# Altium PCB CR-10 Motherboard.PcbDoc (part 6 of 14)
Units mil, origin at the board's own origin, x right, y up, seen from the top; angles counter-clockwise.
Board outline 3970.48 x 2769.68 mil, 2 copper layers (TopLayer, BottomLayer); 147 components, 128 nets, 667 pads, 614 vias.
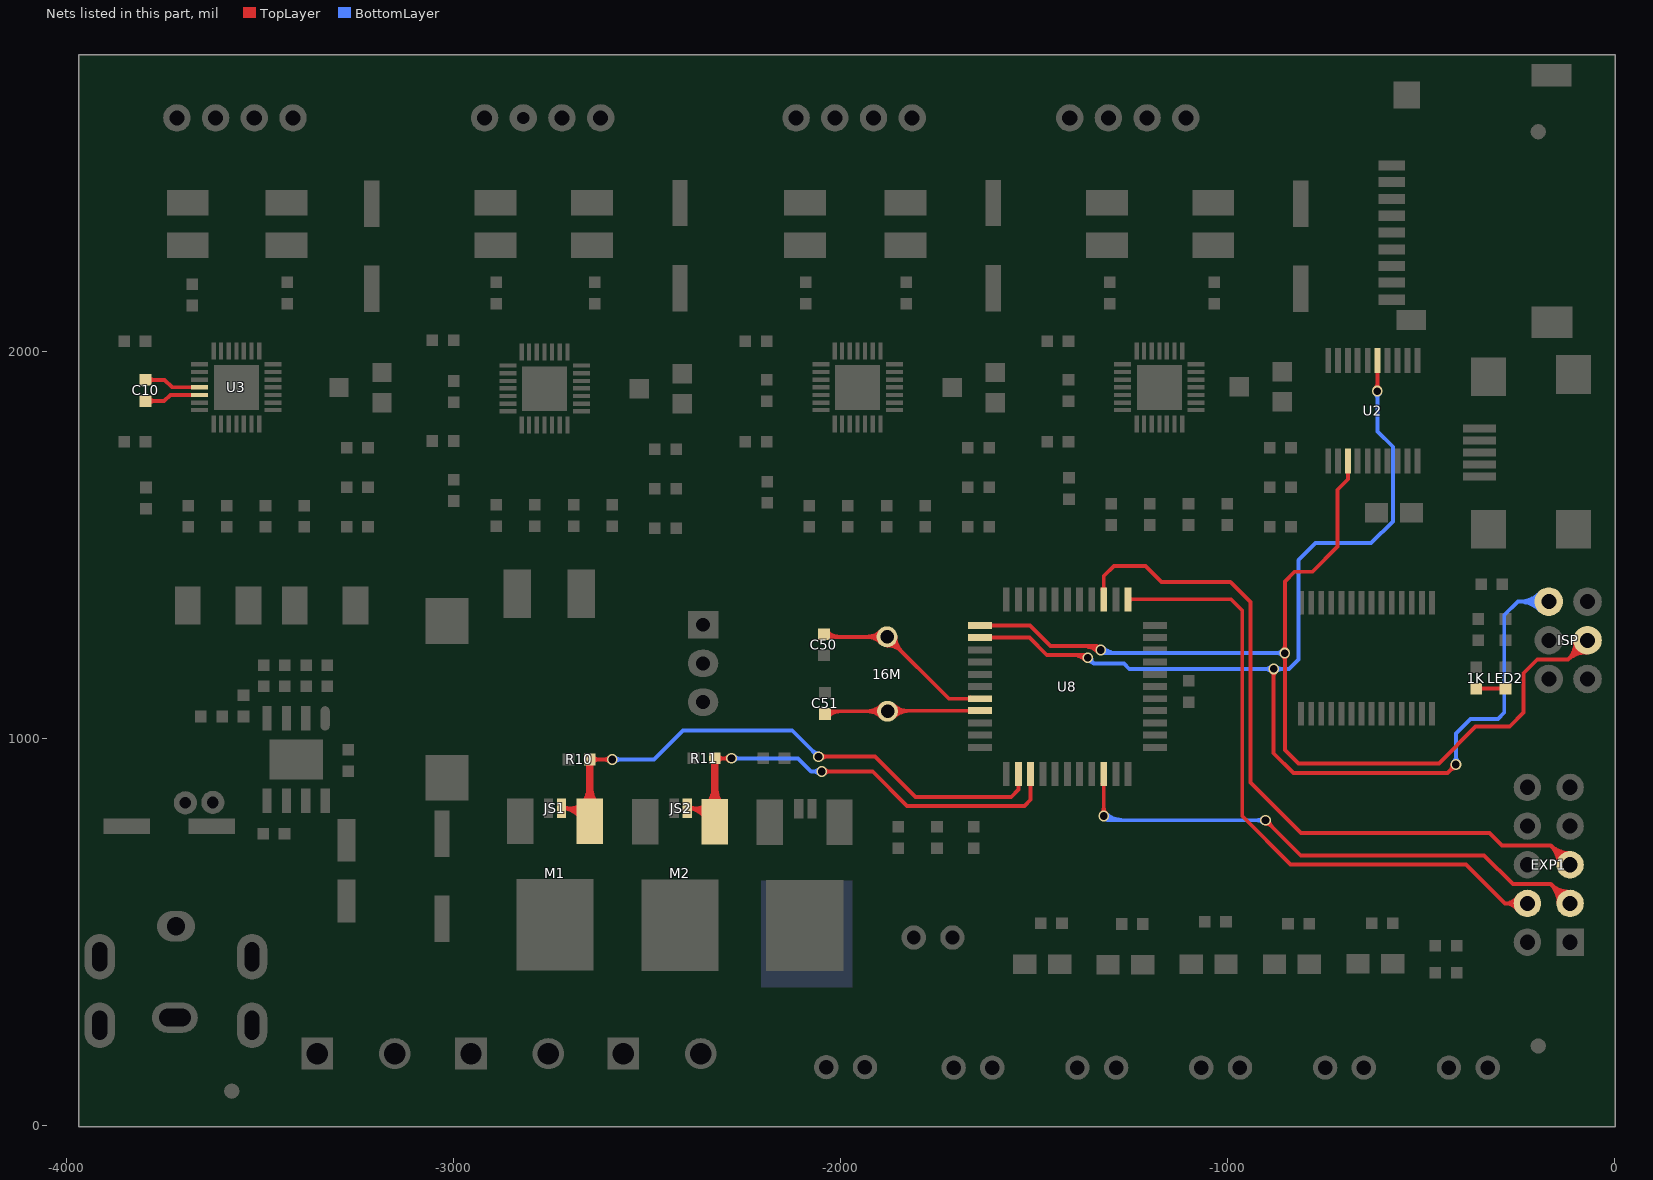
[diagram p6: the nets of this part, all layers, seen from the top]

## Via types
v1: diameter 28, hole 18, TopLayer to BottomLayer, tented both sides, 246 vias
v2: diameter 27.56, hole 19.68, TopLayer to BottomLayer, tented both sides, 196 vias
v3: diameter 20, hole 12, TopLayer to BottomLayer, tented both sides, 124 vias
v4: diameter 27.56, hole 11.81, TopLayer to BottomLayer, tented bottom, 16 vias
v5: diameter 27.56, hole 19.68, TopLayer to BottomLayer, 16 vias
v6: diameter 20, hole 12, TopLayer to BottomLayer, 12 vias
v7: diameter 28, hole 11.81, TopLayer to BottomLayer, tented both sides, 4 vias

## Nets (pads, with @x,y where several pads share a name; then routed paths per layer and width w, separated by ;. In a path a pad name is that pad's centre, name@x,y a point inside that pad or via, vN(x,y) a via of type N, cw(c..) or ccw(c..) an arc to the next point about the centre after c; other vN are vias at no path point) (continued)
Hotbed: JS1.1 M1.1 R10.1 U8.13 | length 6196.2
  TopLayer w10: M1.1@-2647.54,786.84 -2681.54,820.84 JS1.1@-2720.54,820.84 ; R10.1@-2647.54,946.84 v2(-2589.54,946.84) ; v2@-2056.54,954.84 -1910.54,954.84 -1805.54,849.84 -1558.54,849.84 -1539.54,868.84 U8.13@-1539.54,908.84 ; JS1.1@-2720.54,820.84 cw(c-2720.53,760.73) M1.1@-2671.29,795.21 ; JS1.1@-2720.54,820.84 cw(c-2720.53,760.73) M1.1@-2671.29,795.21 ; JS1.1@-2720.54,820.84 cw(c-2720.53,760.73) M1.1@-2671.29,795.21 ; JS1.1@-2720.54,820.84 cw(c-2720.53,760.73) M1.1@-2671.29,795.21 ; JS1.1@-2720.54,820.84 cw(c-2720.53,760.73) M1.1@-2671.29,795.21 ; JS1.1@-2720.54,820.84 cw(c-2720.53,760.73) M1.1@-2671.29,795.21 ; JS1.1@-2720.54,820.84 cw(c-2720.53,760.73) M1.1@-2671.29,795.21 ; JS1.1@-2720.54,820.84 cw(c-2720.53,760.73) M1.1@-2671.29,795.21 ; JS1.1@-2720.54,820.84 cw(c-2720.53,760.73) M1.1@-2671.29,795.21 ; JS1.1@-2715.59,815.89 cw(c-2703.64,803.94) -2703.64,820.84 ; JS1.1@-2715.59,815.89 cw(c-2703.64,803.94) -2703.64,820.84 ; JS1.1@-2715.59,815.89 cw(c-2703.64,803.94) -2703.64,820.84 ; JS1.1@-2715.59,815.89 cw(c-2703.64,803.94) -2703.64,820.84 ; JS1.1@-2715.59,815.89 cw(c-2703.64,803.94) -2703.64,820.84 ; JS1.1@-2715.59,815.89 cw(c-2703.64,803.94) -2703.64,820.84 ; JS1.1@-2715.59,815.89 cw(c-2703.64,803.94) -2703.64,820.84 ; JS1.1@-2715.59,815.89 cw(c-2703.64,803.94) -2703.64,820.84 ; JS1.1@-2715.59,815.89 cw(c-2703.64,803.94) -2703.64,820.84 ; JS1.1@-2715.59,825.79 ccw(c-2703.64,837.74) -2703.64,820.84 ; JS1.1@-2715.59,825.79 ccw(c-2703.64,837.74) -2703.64,820.84 ; JS1.1@-2715.59,825.79 ccw(c-2703.64,837.74) -2703.64,820.84 ; JS1.1@-2715.59,825.79 ccw(c-2703.64,837.74) -2703.64,820.84 ; JS1.1@-2715.59,825.79 ccw(c-2703.64,837.74) -2703.64,820.84 ; JS1.1@-2715.59,825.79 ccw(c-2703.64,837.74) -2703.64,820.84 ; JS1.1@-2715.59,825.79 ccw(c-2703.64,837.74) -2703.64,820.84 ; JS1.1@-2715.59,825.79 ccw(c-2703.64,837.74) -2703.64,820.84 ; JS1.1@-2715.59,825.79 ccw(c-2703.64,837.74) -2703.64,820.84 ; -2701.32,820.84 cw(c-2701.32,774.18) M1.1@-2663.1,800.94 ; -2701.32,820.84 cw(c-2701.32,774.18) M1.1@-2663.1,800.94 ; -2701.32,820.84 cw(c-2701.32,774.18) M1.1@-2663.1,800.94 ; -2701.32,820.84 cw(c-2701.32,774.18) M1.1@-2663.1,800.94 ; -2701.32,820.84 cw(c-2701.32,774.18) M1.1@-2663.1,800.94 ; -2701.32,820.84 cw(c-2701.32,774.18) M1.1@-2663.1,800.94 ; -2701.32,820.84 cw(c-2701.32,774.18) M1.1@-2663.1,800.94 ; -2701.32,820.84 cw(c-2701.32,774.18) M1.1@-2663.1,800.94 ; -2701.32,820.84 cw(c-2701.32,774.18) M1.1@-2663.1,800.94 ; -2695.82,820.84 ccw(c-2695.82,860.13) M1.1@-2668.04,832.35 ; -2695.82,820.84 ccw(c-2695.82,860.13) M1.1@-2668.04,832.35 ; -2695.82,820.84 ccw(c-2695.82,860.13) M1.1@-2668.04,832.35 ; -2695.82,820.84 ccw(c-2695.82,860.13) M1.1@-2668.04,832.35 ; -2695.82,820.84 ccw(c-2695.82,860.13) M1.1@-2668.04,832.35 ; -2695.82,820.84 ccw(c-2695.82,860.13) M1.1@-2668.04,832.35 ; -2695.82,820.84 ccw(c-2695.82,860.13) M1.1@-2668.04,832.35 ; -2695.82,820.84 ccw(c-2695.82,860.13) M1.1@-2668.04,832.35 ; -2695.82,820.84 ccw(c-2695.82,860.13) M1.1@-2668.04,832.35 ; -2682.11,820.84 cw(c-2682.11,787.63) M1.1@-2654.91,806.68 ; -2682.11,820.84 cw(c-2682.11,787.63) M1.1@-2654.91,806.68 ; -2682.11,820.84 cw(c-2682.11,787.63) M1.1@-2654.91,806.68 ; -2682.11,820.84 cw(c-2682.11,787.63) M1.1@-2654.91,806.68 ; -2682.11,820.84 cw(c-2682.11,787.63) M1.1@-2654.91,806.68 ; -2682.11,820.84 cw(c-2682.11,787.63) M1.1@-2654.91,806.68 ; -2682.11,820.84 cw(c-2682.11,787.63) M1.1@-2654.91,806.68 ; -2682.11,820.84 cw(c-2682.11,787.63) M1.1@-2654.91,806.68 ; -2682.11,820.84 cw(c-2682.11,787.63) M1.1@-2654.91,806.68 ; M1.1@-2668.04,832.35 ccw(c-2717.55,881.85) -2647.54,881.85 ; M1.1@-2668.04,832.35 ccw(c-2717.55,881.85) -2647.54,881.85 ; M1.1@-2668.04,832.35 ccw(c-2717.55,881.85) -2647.54,881.85 ; M1.1@-2668.04,832.35 ccw(c-2717.55,881.85) -2647.54,881.85 ; M1.1@-2668.04,832.35 ccw(c-2717.55,881.85) -2647.54,881.85 ; M1.1@-2660.97,825.28 ccw(c-2693.41,857.71) -2647.54,857.71 ; M1.1@-2660.97,825.28 ccw(c-2693.41,857.71) -2647.54,857.71 ; M1.1@-2660.97,825.28 ccw(c-2693.41,857.71) -2647.54,857.71 ; M1.1@-2660.97,825.28 ccw(c-2693.41,857.71) -2647.54,857.71 ; M1.1@-2660.97,825.28 ccw(c-2693.41,857.71) -2647.54,857.71 ; R10.1@-2654.61,939.77 cw(c-2671.68,922.7) -2647.54,922.7 ; R10.1@-2654.61,939.77 cw(c-2671.68,922.7) -2647.54,922.7 ; R10.1@-2654.61,939.77 cw(c-2671.68,922.7) -2647.54,922.7 ; R10.1@-2654.61,939.77 cw(c-2671.68,922.7) -2647.54,922.7 ; R10.1@-2654.61,939.77 cw(c-2671.68,922.7) -2647.54,922.7 ; -2647.54,857.71 ccw(c-2601.67,857.71) M1.1@-2634.1,825.28 ; -2647.54,857.71 ccw(c-2601.67,857.71) M1.1@-2634.1,825.28 ; -2647.54,857.71 ccw(c-2601.67,857.71) M1.1@-2634.1,825.28 ; -2647.54,857.71 ccw(c-2601.67,857.71) M1.1@-2634.1,825.28 ; -2647.54,857.71 ccw(c-2601.67,857.71) M1.1@-2634.1,825.28 ; -2647.54,881.85 ccw(c-2577.52,881.85) M1.1@-2627.03,832.35 ; -2647.54,881.85 ccw(c-2577.52,881.85) M1.1@-2627.03,832.35 ; -2647.54,881.85 ccw(c-2577.52,881.85) M1.1@-2627.03,832.35 ; -2647.54,881.85 ccw(c-2577.52,881.85) M1.1@-2627.03,832.35 ; -2647.54,881.85 ccw(c-2577.52,881.85) M1.1@-2627.03,832.35 ; -2647.54,922.7 cw(c-2623.39,922.7) R10.1@-2640.46,939.77 ; -2647.54,922.7 cw(c-2623.39,922.7) R10.1@-2640.46,939.77 ; -2647.54,922.7 cw(c-2623.39,922.7) R10.1@-2640.46,939.77 ; -2647.54,922.7 cw(c-2623.39,922.7) R10.1@-2640.46,939.77 ; -2647.54,922.7 cw(c-2623.39,922.7) R10.1@-2640.46,939.77 ; R10.1@-2640.46,939.77 cw(c-2623.39,922.7) -2623.39,946.84 ; R10.1@-2640.46,939.77 cw(c-2623.39,922.7) -2623.39,946.84 ; R10.1@-2640.46,939.77 cw(c-2623.39,922.7) -2623.39,946.84 ; R10.1@-2640.46,939.77 cw(c-2623.39,922.7) -2623.39,946.84 ; R10.1@-2640.46,939.77 cw(c-2623.39,922.7) -2623.39,946.84 ; R10.1@-2640.46,939.77 cw(c-2623.39,922.7) -2623.39,946.84 ; R10.1@-2640.46,939.77 cw(c-2623.39,922.7) -2623.39,946.84 ; R10.1@-2640.46,939.77 cw(c-2623.39,922.7) -2623.39,946.84 ; R10.1@-2640.46,939.77 cw(c-2623.39,922.7) -2623.39,946.84 ; R10.1@-2640.46,953.91 ccw(c-2623.39,970.98) -2623.39,946.84 ; R10.1@-2640.46,953.91 ccw(c-2623.39,970.98) -2623.39,946.84 ; R10.1@-2640.46,953.91 ccw(c-2623.39,970.98) -2623.39,946.84 ; R10.1@-2640.46,953.91 ccw(c-2623.39,970.98) -2623.39,946.84 ; R10.1@-2640.46,953.91 ccw(c-2623.39,970.98) -2623.39,946.84 ; R10.1@-2640.46,953.91 ccw(c-2623.39,970.98) -2623.39,946.84 ; R10.1@-2640.46,953.91 ccw(c-2623.39,970.98) -2623.39,946.84 ; R10.1@-2640.46,953.91 ccw(c-2623.39,970.98) -2623.39,946.84 ; R10.1@-2640.46,953.91 ccw(c-2623.39,970.98) -2623.39,946.84 ; -2610.73,946.84 cw(c-2610.73,925.65) v2@-2595.74,940.63 ; -2610.73,946.84 ccw(c-2610.73,968.04) v2@-2595.74,953.05 ; -2610.73,946.84 cw(c-2610.73,925.65) v2@-2595.74,940.63 ; -2610.73,946.84 ccw(c-2610.73,968.04) v2@-2595.74,953.05 ; -2610.73,946.84 cw(c-2610.73,925.65) v2@-2595.74,940.63 ; -2610.73,946.84 ccw(c-2610.73,968.04) v2@-2595.74,953.05 ; -2610.73,946.84 cw(c-2610.73,925.65) v2@-2595.74,940.63 ; -2610.73,946.84 ccw(c-2610.73,968.04) v2@-2595.74,953.05 ; -2610.73,946.84 cw(c-2610.73,925.65) v2@-2595.74,940.63 ; -2610.73,946.84 ccw(c-2610.73,968.04) v2@-2595.74,953.05 ; -2610.73,946.84 ccw(c-2610.73,968.04) v2@-2595.74,953.05 ; -2610.73,946.84 cw(c-2610.73,925.65) v2@-2595.74,940.63 ; -2610.73,946.84 ccw(c-2610.73,968.04) v2@-2595.74,953.05 ; -2610.73,946.84 cw(c-2610.73,925.65) v2@-2595.74,940.63 ; -2610.73,946.84 ccw(c-2610.73,968.04) v2@-2595.74,953.05 ; -2610.73,946.84 cw(c-2610.73,925.65) v2@-2595.74,940.63 ; -2610.73,946.84 ccw(c-2610.73,968.04) v2@-2595.74,953.05 ; -2610.73,946.84 cw(c-2610.73,925.65) v2@-2595.74,940.63 ; v2@-2050.33,947.63 cw(c-2032.93,930.23) -2032.93,954.84 ; v2@-2050.33,947.63 cw(c-2032.93,930.23) -2032.93,954.84 ; v2@-2050.33,947.63 cw(c-2032.93,930.23) -2032.93,954.84 ; v2@-2050.33,947.63 cw(c-2032.93,930.23) -2032.93,954.84 ; v2@-2050.33,947.63 cw(c-2032.93,930.23) -2032.93,954.84 ; v2@-2050.33,947.63 cw(c-2032.93,930.23) -2032.93,954.84 ; v2@-2050.33,960.05 ccw(c-2037.75,972.62) -2037.75,954.84 ; v2@-2050.33,960.05 ccw(c-2037.75,972.62) -2037.75,954.84 ; v2@-2050.33,960.05 ccw(c-2037.75,972.62) -2037.75,954.84 ; v2@-2050.33,960.05 ccw(c-2037.75,972.62) -2037.75,954.84 ; v2@-2050.33,960.05 ccw(c-2037.75,972.62) -2037.75,954.84 ; v2@-2050.33,960.05 ccw(c-2037.75,972.62) -2037.75,954.84 ; -1539.54,877.19 cw(c-1529.88,877.19) U8.13@-1536.71,884.01 ; -1539.54,877.19 ccw(c-1549.19,877.19) -1542.36,884.01 cw(c-1549.19,877.19) -1539.54,877.19 ; -1539.54,877.19 cw(c-1529.88,877.19) U8.13@-1536.71,884.01 ; -1539.54,877.19 cw(c-1529.88,877.19) U8.13@-1536.71,884.01 ; -1539.54,877.19 cw(c-1529.88,877.19) U8.13@-1536.71,884.01 ; -1539.54,877.19 cw(c-1529.88,877.19) U8.13@-1536.71,884.01 ; -1539.54,877.19 cw(c-1529.88,877.19) U8.13@-1536.71,884.01
  TopLayer w20: M1.1@-2647.54,786.84 R10.1@-2647.54,946.84 ; M1.1@-2664.51,828.81 ccw(c-2705.48,869.78) -2647.54,869.78 ; M1.1@-2664.51,828.81 ccw(c-2705.48,869.78) -2647.54,869.78 ; M1.1@-2664.51,828.81 ccw(c-2705.48,869.78) -2647.54,869.78 ; M1.1@-2664.51,828.81 ccw(c-2705.48,869.78) -2647.54,869.78 ; -2647.54,869.78 ccw(c-2589.59,869.78) M1.1@-2630.56,828.81 ; -2647.54,869.78 ccw(c-2589.59,869.78) M1.1@-2630.56,828.81 ; -2647.54,869.78 ccw(c-2589.59,869.78) M1.1@-2630.56,828.81 ; -2647.54,869.78 ccw(c-2589.59,869.78) M1.1@-2630.56,828.81
  BottomLayer w10: v2(-2589.54,946.84) -2481.54,946.84 -2406.54,1021.84 -2124.54,1021.84 v2(-2056.54,953.84) ; v2@-2583.33,940.63 cw(c-2568.34,925.65) -2568.34,946.84 ; v2@-2583.33,940.63 cw(c-2568.34,925.65) -2568.34,946.84 ; v2@-2583.33,940.63 cw(c-2568.34,925.65) -2568.34,946.84 ; v2@-2583.33,940.63 cw(c-2568.34,925.65) -2568.34,946.84 ; v2@-2583.33,940.63 cw(c-2568.34,925.65) -2568.34,946.84 ; v2@-2583.33,940.63 cw(c-2568.34,925.65) -2568.34,946.84 ; v2@-2583.33,940.63 cw(c-2568.34,925.65) -2568.34,946.84 ; v2@-2583.33,940.63 cw(c-2568.34,925.65) -2568.34,946.84 ; v2@-2583.33,940.63 cw(c-2568.34,925.65) -2568.34,946.84 ; v2@-2583.33,953.05 ccw(c-2568.34,968.04) -2568.34,946.84 ; v2@-2583.33,953.05 ccw(c-2568.34,968.04) -2568.34,946.84 ; v2@-2583.33,953.05 ccw(c-2568.34,968.04) -2568.34,946.84 ; v2@-2583.33,953.05 ccw(c-2568.34,968.04) -2568.34,946.84 ; v2@-2583.33,953.05 ccw(c-2568.34,968.04) -2568.34,946.84 ; v2@-2583.33,953.05 ccw(c-2568.34,968.04) -2568.34,946.84 ; v2@-2583.33,953.05 ccw(c-2568.34,968.04) -2568.34,946.84 ; v2@-2583.33,953.05 ccw(c-2568.34,968.04) -2568.34,946.84 ; v2@-2583.33,953.05 ccw(c-2568.34,968.04) -2568.34,946.84 ; -2071.52,968.83 cw(c-2086.51,953.84) v2@-2065.31,953.84 ; -2071.52,968.83 ccw(c-2056.54,983.82) v2@-2056.54,962.62 ; -2071.52,968.83 cw(c-2086.51,953.84) v2@-2065.31,953.84 ; -2071.52,968.83 ccw(c-2056.54,983.82) v2@-2056.54,962.62 ; -2071.52,968.83 cw(c-2086.51,953.84) v2@-2065.31,953.84 ; -2071.52,968.83 ccw(c-2056.54,983.82) v2@-2056.54,962.62 ; -2071.52,968.83 cw(c-2086.51,953.84) v2@-2065.31,953.84 ; -2071.52,968.83 ccw(c-2056.54,983.82) v2@-2056.54,962.62 ; -2071.52,968.83 cw(c-2086.51,953.84) v2@-2065.31,953.84 ; -2071.52,968.83 ccw(c-2056.54,983.82) v2@-2056.54,962.62 ; -2071.52,968.83 ccw(c-2056.54,983.82) v2@-2056.54,962.62 ; -2071.52,968.83 cw(c-2086.51,953.84) v2@-2065.31,953.84 ; -2071.52,968.83 ccw(c-2056.54,983.82) v2@-2056.54,962.62 ; -2071.52,968.83 cw(c-2086.51,953.84) v2@-2065.31,953.84 ; -2071.52,968.83 ccw(c-2056.54,983.82) v2@-2056.54,962.62 ; -2071.52,968.83 cw(c-2086.51,953.84) v2@-2065.31,953.84 ; -2071.52,968.83 ccw(c-2056.54,983.82) v2@-2056.54,962.62 ; -2071.52,968.83 cw(c-2086.51,953.84) v2@-2065.31,953.84
Hotend: JS2.1 M2.1 R11.1 U8.14 | length 5838.6
  TopLayer w10: M2.1@-2324.54,785.84 -2359.54,820.84 ; R11.1@-2324.54,949.84 v2(-2281.54,949.84) ; v2(-2048.54,915.84) -1916.54,915.84 -1827.54,826.84 -1524.54,826.84 -1508.54,842.84 U8.14@-1508.54,908.84 ; JS2.1@-2395.54,820.84 cw(c-2395.53,765.72) M2.1@-2349.01,795.29 ; JS2.1@-2395.54,820.84 cw(c-2395.53,765.72) M2.1@-2349.01,795.29 ; JS2.1@-2395.54,820.84 cw(c-2395.53,765.72) M2.1@-2349.01,795.29 ; JS2.1@-2395.54,820.84 cw(c-2395.53,765.72) M2.1@-2349.01,795.29 ; JS2.1@-2395.54,820.84 cw(c-2395.53,765.72) M2.1@-2349.01,795.29 ; JS2.1@-2395.54,820.84 cw(c-2395.53,765.72) M2.1@-2349.01,795.29 ; JS2.1@-2395.54,820.84 cw(c-2395.53,765.72) M2.1@-2349.01,795.29 ; JS2.1@-2395.54,820.84 cw(c-2395.53,765.72) M2.1@-2349.01,795.29 ; JS2.1@-2395.54,820.84 cw(c-2395.53,765.72) M2.1@-2349.01,795.29 ; JS2.1@-2395.54,820.84 -2359.54,820.84 ; JS2.1@-2390.59,815.89 cw(c-2378.64,803.94) -2378.64,820.84 ; JS2.1@-2390.59,815.89 cw(c-2378.64,803.94) -2378.64,820.84 ; JS2.1@-2390.59,815.89 cw(c-2378.64,803.94) -2378.64,820.84 ; JS2.1@-2390.59,815.89 cw(c-2378.64,803.94) -2378.64,820.84 ; JS2.1@-2390.59,815.89 cw(c-2378.64,803.94) -2378.64,820.84 ; JS2.1@-2390.59,815.89 cw(c-2378.64,803.94) -2378.64,820.84 ; JS2.1@-2390.59,815.89 cw(c-2378.64,803.94) -2378.64,820.84 ; JS2.1@-2390.59,815.89 cw(c-2378.64,803.94) -2378.64,820.84 ; JS2.1@-2390.59,815.89 cw(c-2378.64,803.94) -2378.64,820.84 ; JS2.1@-2390.59,825.79 ccw(c-2378.64,837.74) -2378.64,820.84 ; JS2.1@-2390.59,825.79 ccw(c-2378.64,837.74) -2378.64,820.84 ; JS2.1@-2390.59,825.79 ccw(c-2378.64,837.74) -2378.64,820.84 ; JS2.1@-2390.59,825.79 ccw(c-2378.64,837.74) -2378.64,820.84 ; JS2.1@-2390.59,825.79 ccw(c-2378.64,837.74) -2378.64,820.84 ; JS2.1@-2390.59,825.79 ccw(c-2378.64,837.74) -2378.64,820.84 ; JS2.1@-2390.59,825.79 ccw(c-2378.64,837.74) -2378.64,820.84 ; JS2.1@-2390.59,825.79 ccw(c-2378.64,837.74) -2378.64,820.84 ; JS2.1@-2390.59,825.79 ccw(c-2378.64,837.74) -2378.64,820.84 ; -2377.33,820.84 cw(c-2377.33,777.29) M2.1@-2340.57,800.65 ; -2377.33,820.84 cw(c-2377.33,777.29) M2.1@-2340.57,800.65 ; -2377.33,820.84 cw(c-2377.33,777.29) M2.1@-2340.57,800.65 ; -2377.33,820.84 cw(c-2377.33,777.29) M2.1@-2340.57,800.65 ; -2377.33,820.84 cw(c-2377.33,777.29) M2.1@-2340.57,800.65 ; -2377.33,820.84 cw(c-2377.33,777.29) M2.1@-2340.57,800.65 ; -2377.33,820.84 cw(c-2377.33,777.29) M2.1@-2340.57,800.65 ; -2377.33,820.84 cw(c-2377.33,777.29) M2.1@-2340.57,800.65 ; -2377.33,820.84 cw(c-2377.33,777.29) M2.1@-2340.57,800.65 ; -2370.41,820.84 ccw(c-2370.41,856.71) M2.1@-2345.04,831.35 ; -2370.41,820.84 ccw(c-2370.41,856.71) M2.1@-2345.04,831.35 ; -2370.41,820.84 ccw(c-2370.41,856.71) M2.1@-2345.04,831.35 ; -2370.41,820.84 ccw(c-2370.41,856.71) M2.1@-2345.04,831.35 ; -2370.41,820.84 ccw(c-2370.41,856.71) M2.1@-2345.04,831.35 ; -2370.41,820.84 ccw(c-2370.41,856.71) M2.1@-2345.04,831.35 ; -2370.41,820.84 ccw(c-2370.41,856.71) M2.1@-2345.04,831.35 ; -2370.41,820.84 ccw(c-2370.41,856.71) M2.1@-2345.04,831.35 ; -2370.41,820.84 ccw(c-2370.41,856.71) M2.1@-2345.04,831.35 ; -2359.53,820.84 ccw(c-2359.53,833.58) M2.1@-2348.85,826.64 ; -2359.53,820.84 ccw(c-2359.53,833.58) M2.1@-2348.85,826.64 ; -2359.53,820.84 ccw(c-2359.53,833.58) M2.1@-2348.85,826.64 ; -2359.53,820.84 ccw(c-2359.53,833.58) M2.1@-2348.85,826.64 ; -2359.53,820.84 ccw(c-2359.53,833.58) M2.1@-2348.85,826.64 ; -2359.53,820.84 ccw(c-2359.53,833.58) M2.1@-2348.85,826.64 ; -2359.53,820.84 ccw(c-2359.53,833.58) M2.1@-2348.85,826.64 ; -2359.53,820.84 ccw(c-2359.53,833.58) M2.1@-2348.85,826.64 ; -2359.53,820.84 ccw(c-2359.53,833.58) M2.1@-2348.85,826.64 ; -2359.12,820.84 cw(c-2359.12,788.86) M2.1@-2332.13,806.02 ; -2359.12,820.84 cw(c-2359.12,788.86) M2.1@-2332.13,806.02 ; -2359.12,820.84 cw(c-2359.12,788.86) M2.1@-2332.13,806.02 ; -2359.12,820.84 cw(c-2359.12,788.86) M2.1@-2332.13,806.02 ; -2359.12,820.84 cw(c-2359.12,788.86) M2.1@-2332.13,806.02 ; -2359.12,820.84 cw(c-2359.12,788.86) M2.1@-2332.13,806.02 ; -2359.12,820.84 cw(c-2359.12,788.86) M2.1@-2332.13,806.02 ; -2359.12,820.84 cw(c-2359.12,788.86) M2.1@-2332.13,806.02 ; -2359.12,820.84 cw(c-2359.12,788.86) M2.1@-2332.13,806.02 ; M2.1@-2345.04,831.35 ccw(c-2394.55,880.85) -2324.54,880.85 ; M2.1@-2345.04,831.35 ccw(c-2394.55,880.85) -2324.54,880.85 ; M2.1@-2345.04,831.35 ccw(c-2394.55,880.85) -2324.54,880.85 ; M2.1@-2345.04,831.35 ccw(c-2394.55,880.85) -2324.54,880.85 ; M2.1@-2345.04,831.35 ccw(c-2394.55,880.85) -2324.54,880.85 ; M2.1@-2337.97,824.28 ccw(c-2370.41,856.71) -2324.54,856.71 ; M2.1@-2337.97,824.28 ccw(c-2370.41,856.71) -2324.54,856.71 ; M2.1@-2337.97,824.28 ccw(c-2370.41,856.71) -2324.54,856.71 ; M2.1@-2337.97,824.28 ccw(c-2370.41,856.71) -2324.54,856.71 ; M2.1@-2337.97,824.28 ccw(c-2370.41,856.71) -2324.54,856.71 ; R11.1@-2331.61,942.77 cw(c-2348.68,925.7) -2324.54,925.7 ; R11.1@-2331.61,942.77 cw(c-2348.68,925.7) -2324.54,925.7 ; R11.1@-2331.61,942.77 cw(c-2348.68,925.7) -2324.54,925.7 ; R11.1@-2331.61,942.77 cw(c-2348.68,925.7) -2324.54,925.7 ; R11.1@-2331.61,942.77 cw(c-2348.68,925.7) -2324.54,925.7 ; -2324.54,856.71 ccw(c-2278.67,856.71) M2.1@-2311.1,824.28 ; -2324.54,856.71 ccw(c-2278.67,856.71) M2.1@-2311.1,824.28 ; -2324.54,856.71 ccw(c-2278.67,856.71) M2.1@-2311.1,824.28 ; -2324.54,856.71 ccw(c-2278.67,856.71) M2.1@-2311.1,824.28 ; -2324.54,856.71 ccw(c-2278.67,856.71) M2.1@-2311.1,824.28 ; -2324.54,880.85 ccw(c-2254.52,880.85) M2.1@-2304.03,831.35 ; -2324.54,880.85 ccw(c-2254.52,880.85) M2.1@-2304.03,831.35 ; -2324.54,880.85 ccw(c-2254.52,880.85) M2.1@-2304.03,831.35 ; -2324.54,880.85 ccw(c-2254.52,880.85) M2.1@-2304.03,831.35 ; -2324.54,880.85 ccw(c-2254.52,880.85) M2.1@-2304.03,831.35 ; -2324.54,925.7 cw(c-2300.39,925.7) R11.1@-2317.46,942.77 ; -2324.54,925.7 cw(c-2300.39,925.7) R11.1@-2317.46,942.77 ; -2324.54,925.7 cw(c-2300.39,925.7) R11.1@-2317.46,942.77 ; -2324.54,925.7 cw(c-2300.39,925.7) R11.1@-2317.46,942.77 ; -2324.54,925.7 cw(c-2300.39,925.7) R11.1@-2317.46,942.77 ; R11.1@-2317.46,942.77 cw(c-2300.39,925.7) -2300.39,949.84 ; R11.1@-2317.46,942.77 cw(c-2300.39,925.7) -2300.39,949.84 ; R11.1@-2317.46,942.77 cw(c-2300.39,925.7) -2300.39,949.84 ; R11.1@-2317.46,942.77 cw(c-2300.39,925.7) -2300.39,949.84 ; R11.1@-2317.46,942.77 cw(c-2300.39,925.7) -2300.39,949.84 ; R11.1@-2317.46,942.77 cw(c-2300.39,925.7) -2300.39,949.84 ; R11.1@-2317.46,942.77 cw(c-2300.39,925.7) -2300.39,949.84 ; R11.1@-2317.46,942.77 cw(c-2300.39,925.7) -2300.39,949.84 ; R11.1@-2317.46,942.77 cw(c-2300.39,925.7) -2300.39,949.84 ; R11.1@-2317.46,956.91 ccw(c-2300.39,973.98) -2300.39,949.84 ; R11.1@-2317.46,956.91 ccw(c-2300.39,973.98) -2300.39,949.84 ; R11.1@-2317.46,956.91 ccw(c-2300.39,973.98) -2300.39,949.84 ; R11.1@-2317.46,956.91 ccw(c-2300.39,973.98) -2300.39,949.84 ; R11.1@-2317.46,956.91 ccw(c-2300.39,973.98) -2300.39,949.84 ; R11.1@-2317.46,956.91 ccw(c-2300.39,973.98) -2300.39,949.84 ; R11.1@-2317.46,956.91 ccw(c-2300.39,973.98) -2300.39,949.84 ; R11.1@-2317.46,956.91 ccw(c-2300.39,973.98) -2300.39,949.84 ; R11.1@-2317.46,956.91 ccw(c-2300.39,973.98) -2300.39,949.84 ; -2302.73,949.84 cw(c-2302.73,928.65) v2@-2287.74,943.63 ; -2302.73,949.84 ccw(c-2302.73,971.04) v2@-2287.74,956.05 ; -2302.73,949.84 cw(c-2302.73,928.65) v2@-2287.74,943.63 ; -2302.73,949.84 ccw(c-2302.73,971.04) v2@-2287.74,956.05 ; -2302.73,949.84 cw(c-2302.73,928.65) v2@-2287.74,943.63 ; -2302.73,949.84 ccw(c-2302.73,971.04) v2@-2287.74,956.05 ; -2302.73,949.84 cw(c-2302.73,928.65) v2@-2287.74,943.63 ; -2302.73,949.84 ccw(c-2302.73,971.04) v2@-2287.74,956.05 ; -2302.73,949.84 cw(c-2302.73,928.65) v2@-2287.74,943.63 ; -2302.73,949.84 ccw(c-2302.73,971.04) v2@-2287.74,956.05 ; -2302.73,949.84 ccw(c-2302.73,971.04) v2@-2287.74,956.05 ; -2302.73,949.84 cw(c-2302.73,928.65) v2@-2287.74,943.63 ; -2302.73,949.84 ccw(c-2302.73,971.04) v2@-2287.74,956.05 ; -2302.73,949.84 cw(c-2302.73,928.65) v2@-2287.74,943.63 ; -2302.73,949.84 ccw(c-2302.73,971.04) v2@-2287.74,956.05 ; -2302.73,949.84 cw(c-2302.73,928.65) v2@-2287.74,943.63 ; -2302.73,949.84 ccw(c-2302.73,971.04) v2@-2287.74,956.05 ; -2302.73,949.84 cw(c-2302.73,928.65) v2@-2287.74,943.63 ; v2@-2042.33,909.63 cw(c-2027.34,894.65) -2027.34,915.84 ; v2@-2042.33,909.63 cw(c-2027.34,894.65) -2027.34,915.84 ; v2@-2042.33,909.63 cw(c-2027.34,894.65) -2027.34,915.84 ; v2@-2042.33,909.63 cw(c-2027.34,894.65) -2027.34,915.84 ; v2@-2042.33,909.63 cw(c-2027.34,894.65) -2027.34,915.84 ; v2@-2042.33,909.63 cw(c-2027.34,894.65) -2027.34,915.84 ; v2@-2042.33,909.63 cw(c-2027.34,894.65) -2027.34,915.84 ; v2@-2042.33,922.05 ccw(c-2027.34,937.04) -2027.34,915.84 ; v2@-2042.33,922.05 ccw(c-2027.34,937.04) -2027.34,915.84 ; v2@-2042.33,922.05 ccw(c-2027.34,937.04) -2027.34,915.84 ; v2@-2042.33,922.05 ccw(c-2027.34,937.04) -2027.34,915.84 ; v2@-2042.33,922.05 ccw(c-2027.34,937.04) -2027.34,915.84 ; v2@-2042.33,922.05 ccw(c-2027.34,937.04) -2027.34,915.84 ; v2@-2042.33,922.05 ccw(c-2027.34,937.04) -2027.34,915.84 ; U8.14@-1511.36,884.01 cw(c-1518.19,877.19) -1508.54,877.19 ; U8.14@-1511.36,884.01 cw(c-1518.19,877.19) -1508.54,877.19 ; U8.14@-1511.36,884.01 cw(c-1518.19,877.19) -1508.54,877.19 ; U8.14@-1511.36,884.01 cw(c-1518.19,877.19) -1508.54,877.19 ; U8.14@-1511.36,884.01 cw(c-1518.19,877.19) -1508.54,877.19 ; U8.14@-1511.36,884.01 cw(c-1518.19,877.19) -1508.54,877.19 ; -1508.54,877.19 cw(c-1498.88,877.19) U8.14@-1505.71,884.01 ; -1508.54,877.19 cw(c-1498.88,877.19) U8.14@-1505.71,884.01 ; -1508.54,877.19 cw(c-1498.88,877.19) U8.14@-1505.71,884.01 ; -1508.54,877.19 cw(c-1498.88,877.19) U8.14@-1505.71,884.01 ; -1508.54,877.19 cw(c-1498.88,877.19) U8.14@-1505.71,884.01 ; -1508.54,877.19 cw(c-1498.88,877.19) U8.14@-1505.71,884.01
  TopLayer w20: M2.1@-2324.54,785.84 R11.1@-2324.54,949.84 ; M2.1@-2341.51,827.81 ccw(c-2382.48,868.78) -2324.54,868.78 ; M2.1@-2341.51,827.81 ccw(c-2382.48,868.78) -2324.54,868.78 ; M2.1@-2341.51,827.81 ccw(c-2382.48,868.78) -2324.54,868.78 ; M2.1@-2341.51,827.81 ccw(c-2382.48,868.78) -2324.54,868.78 ; -2324.54,868.78 ccw(c-2266.59,868.78) M2.1@-2307.56,827.81 ; -2324.54,868.78 ccw(c-2266.59,868.78) M2.1@-2307.56,827.81 ; -2324.54,868.78 ccw(c-2266.59,868.78) M2.1@-2307.56,827.81 ; -2324.54,868.78 ccw(c-2266.59,868.78) M2.1@-2307.56,827.81
  BottomLayer w10: v2(-2281.54,949.84) -2109.54,949.84 -2075.54,915.84 v2(-2048.54,915.84) ; v2@-2275.33,943.63 cw(c-2260.34,928.65) -2260.34,949.84 ; v2@-2275.33,943.63 cw(c-2260.34,928.65) -2260.34,949.84 ; v2@-2275.33,943.63 cw(c-2260.34,928.65) -2260.34,949.84 ; v2@-2275.33,943.63 cw(c-2260.34,928.65) -2260.34,949.84 ; v2@-2275.33,943.63 cw(c-2260.34,928.65) -2260.34,949.84 ; v2@-2275.33,943.63 cw(c-2260.34,928.65) -2260.34,949.84 ; v2@-2275.33,943.63 cw(c-2260.34,928.65) -2260.34,949.84 ; v2@-2275.33,943.63 cw(c-2260.34,928.65) -2260.34,949.84 ; v2@-2275.33,943.63 cw(c-2260.34,928.65) -2260.34,949.84 ; v2@-2275.33,956.05 ccw(c-2260.34,971.04) -2260.34,949.84 ; v2@-2275.33,956.05 ccw(c-2260.34,971.04) -2260.34,949.84 ; v2@-2275.33,956.05 ccw(c-2260.34,971.04) -2260.34,949.84 ; v2@-2275.33,956.05 ccw(c-2260.34,971.04) -2260.34,949.84 ; v2@-2275.33,956.05 ccw(c-2260.34,971.04) -2260.34,949.84 ; v2@-2275.33,956.05 ccw(c-2260.34,971.04) -2260.34,949.84 ; v2@-2275.33,956.05 ccw(c-2260.34,971.04) -2260.34,949.84 ; v2@-2275.33,956.05 ccw(c-2260.34,971.04) -2260.34,949.84 ; v2@-2275.33,956.05 ccw(c-2260.34,971.04) -2260.34,949.84 ; -2069.73,915.84 cw(c-2069.73,894.65) v2@-2054.74,909.63 ; -2069.73,915.84 ccw(c-2069.73,937.04) v2@-2054.74,922.05 ; -2069.73,915.84 cw(c-2069.73,894.65) v2@-2054.74,909.63 ; -2069.73,915.84 ccw(c-2069.73,937.04) v2@-2054.74,922.05 ; -2069.73,915.84 ccw(c-2069.73,937.04) v2@-2054.74,922.05 ; -2069.73,915.84 cw(c-2069.73,894.65) v2@-2054.74,909.63 ; -2069.73,915.84 ccw(c-2069.73,937.04) v2@-2054.74,922.05 ; -2069.73,915.84 cw(c-2069.73,894.65) v2@-2054.74,909.63
LCD_CS: EXP1.4 U8.34 | length 1842.1
  TopLayer w10: U8.34@-1256.54,1375.84 U8.34@-1256.54,1360.84 -990.54,1360.84 -961.54,1331.84 -961.54,800.84 -836.54,675.84 -383.54,675.84 -282.54,574.84 ; EXP1.4@-249.87,557.63 ccw(c-282.53,535.24) -282.53,574.84 ; EXP1.4@-249.87,592.05 cw(c-282.53,614.44) -282.53,574.84 ; EXP1.4@-241.62,563.29 ccw(c-263.55,548.26) -263.55,574.84 ccw(c-263.55,601.43) EXP1.4@-241.62,586.4 ; EXP1.4@-224.77,574.84 -282.54,574.84 ; -1246.88,1360.84 cw(c-1246.88,1370.5) -1253.71,1363.67 ccw(c-1246.88,1370.5) -1246.88,1360.84 ; -1246.88,1360.84 ccw(c-1246.88,1351.19) -1253.71,1358.01 cw(c-1246.88,1351.19) -1246.88,1360.84
LCD_MOSI: EXP1.3 U8.20 | length 1928.1
  TopLayer w10: v2(-1319.54,800.84) U8.20@-1319.54,908.84 ; v2@-901.54,781.06 cw(c-901.54,759.87) -886.55,774.85 cw(c-871.56,789.84) v2@-892.76,789.84 ; v2(-901.54,789.84) -810.54,698.84 -336.54,698.84 -262.54,624.84 -164.54,624.84 ; EXP1.3@-144.96,575.68 ccw(c-211.85,577.52) -164.53,624.84 ; EXP1.3@-134.96,575.4 ccw(c-179.88,576.64) -148.1,608.41 ccw(c-116.33,640.18) EXP1.3@-115.1,595.27 ; EXP1.3@-115.37,605.26 cw(c-117.21,672.16) -164.53,624.84 ; EXP1.3@-114.54,574.84 -164.54,624.84 ; -1319.54,822.04 cw(c-1340.73,822.04) -1325.74,807.05 ccw(c-1340.73,822.04) -1319.54,822.04 ; -1319.54,822.04 ccw(c-1298.34,822.04) -1313.33,807.05 cw(c-1298.34,822.04) -1319.54,822.04 ; -1319.54,877.19 cw(c-1309.88,877.19) -1316.71,884.01 ccw(c-1309.88,877.19) -1319.54,877.19 ; -1319.54,877.19 ccw(c-1329.19,877.19) -1322.36,884.01 cw(c-1329.19,877.19) -1319.54,877.19
  BottomLayer w10: v2(-1319.54,800.84) -1308.54,789.84 ; v2@-1317.43,792.32 cw(c-1315.18,783.2) -1308.54,789.84 ; v2@-1316.73,792.52 cw(c-1314.49,785.89) -1309.54,790.84 cw(c-1304.59,795.79) v2@-1311.22,798.03 ; v2@-1311.01,798.74 ccw(c-1301.9,796.48) -1308.54,789.84 ; -1298.34,790.84 cw(c-1298.34,822.04) -1320.4,799.98 ccw(c-1295.93,824.45) -1295.93,789.84 ; -1274.2,790.84 cw(c-1274.2,846.18) -1313.33,807.05 ccw(c-1271.78,848.59) -1271.78,789.84 ; v2@-907.74,783.63 ccw(c-922.73,768.65) -922.73,789.84 ccw(c-922.73,811.04) v2@-907.74,796.05 ; v2(-901.54,789.84) -1308.54,789.84
LCD_SCK: EXP1.5 U8.36 | length 2141.4
  TopLayer w10: U8.36@-1319.54,1360.84 -1319.54,1420.84 -1293.54,1446.84 -1211.54,1446.84 -1170.54,1405.84 -992.54,1405.84 -940.54,1353.84 -940.54,887.84 -809.54,756.84 -322.54,756.84 -290.54,724.84 -164.54,724.84 ; EXP1.5@-144.96,675.68 ccw(c-211.85,677.52) -164.53,724.84 ; EXP1.5@-134.96,675.4 ccw(c-179.88,676.64) -148.1,708.41 ccw(c-116.33,740.18) EXP1.5@-115.1,695.27 ; EXP1.5@-115.37,705.26 cw(c-117.21,772.16) -164.53,724.84 ; EXP1.5@-114.54,674.84 -164.54,724.84 ; U8.36@-1322.36,1385.67 ccw(c-1329.19,1392.5) -1319.54,1392.5 ; U8.36@-1322.36,1385.67 ccw(c-1329.19,1392.5) -1319.54,1392.5 ; U8.36@-1322.36,1385.67 ccw(c-1329.19,1392.5) -1319.54,1392.5 ; U8.36@-1322.36,1385.67 ccw(c-1329.19,1392.5) -1319.54,1392.5 ; U8.36@-1322.36,1385.67 ccw(c-1329.19,1392.5) -1319.54,1392.5 ; U8.36@-1322.36,1385.67 ccw(c-1329.19,1392.5) -1319.54,1392.5 ; -1319.54,1392.5 ccw(c-1309.88,1392.5) U8.36@-1316.71,1385.67 ; -1319.54,1392.5 ccw(c-1309.88,1392.5) U8.36@-1316.71,1385.67 ; -1319.54,1392.5 ccw(c-1309.88,1392.5) U8.36@-1316.71,1385.67 ; -1319.54,1392.5 ccw(c-1309.88,1392.5) U8.36@-1316.71,1385.67 ; -1319.54,1392.5 ccw(c-1309.88,1392.5) U8.36@-1316.71,1385.67 ; -1319.54,1392.5 ccw(c-1309.88,1392.5) U8.36@-1316.71,1385.67
MISO: ISP.1 U2.15 U8.2 | length 4035
  TopLayer w10: U8.2@-1639.54,1261.84 -1511.84,1261.84 -1466.84,1216.84 -1367.54,1216.84 v2(-1360.54,1209.84) ; v2(-880.54,1180.84) -880.54,962.84 -829.54,911.84 -431.54,911.84 v2(-409.54,933.84) ; v2(-612.54,1898.84) U2.15@-612.54,1977.59 ; v2@-418.31,933.84 cw(c-439.51,933.84) -424.52,918.85 cw(c-409.54,903.87) v2@-409.54,925.06 ; U8.2@-1614.71,1259.01 cw(c-1607.88,1252.19) -1607.88,1261.84 ; U8.2@-1614.71,1259.01 cw(c-1607.88,1252.19) -1607.88,1261.84 ; U8.2@-1614.71,1259.01 cw(c-1607.88,1252.19) -1607.88,1261.84 ; U8.2@-1614.71,1259.01 cw(c-1607.88,1252.19) -1607.88,1261.84 ; U8.2@-1614.71,1259.01 cw(c-1607.88,1252.19) -1607.88,1261.84 ; U8.2@-1614.71,1259.01 cw(c-1607.88,1252.19) -1607.88,1261.84 ; U8.2@-1614.71,1264.67 ccw(c-1607.88,1271.5) -1607.88,1261.84 ; U8.2@-1614.71,1264.67 ccw(c-1607.88,1271.5) -1607.88,1261.84 ; U8.2@-1614.71,1264.67 ccw(c-1607.88,1271.5) -1607.88,1261.84 ; U8.2@-1614.71,1264.67 ccw(c-1607.88,1271.5) -1607.88,1261.84 ; U8.2@-1614.71,1264.67 ccw(c-1607.88,1271.5) -1607.88,1261.84 ; U8.2@-1614.71,1264.67 ccw(c-1607.88,1271.5) -1607.88,1261.84 ; -880.54,1159.65 cw(c-859.34,1159.65) -874.33,1174.63 ccw(c-859.34,1159.65) -880.54,1159.65 ; -880.54,1159.65 ccw(c-901.73,1159.65) -886.74,1174.63 cw(c-901.73,1159.65) -880.54,1159.65 ; -612.54,1920.04 cw(c-633.73,1920.04) -618.74,1905.05 ccw(c-633.73,1920.04) -612.54,1920.04 ; -612.54,1920.04 ccw(c-591.34,1920.04) -606.33,1905.05 cw(c-591.34,1920.04) -612.54,1920.04 ; -1398.63,1216.84 cw(c-1398.63,1171.75) -1366.74,1203.63 ccw(c-1398.63,1171.75) -1398.63,1216.84 ; -1374.49,1216.84 cw(c-1374.49,1195.89) -1359.67,1210.71 ccw(c-1374.49,1195.89) -1374.49,1216.84
  BottomLayer w10: v2(-1360.54,1209.84) -1345.54,1194.84 ; v2(-612.54,1898.84) -612.54,1794.84 -572.54,1754.84 -572.54,1561.84 -628.54,1505.84 -772.54,1505.84 -816.54,1461.84 -816.54,1204.84 -840.54,1180.84 -1253.54,1180.84 -1267.54,1194.84 -1345.54,1194.84 ; v2@-415.74,940.05 ccw(c-430.73,955.04) -409.54,955.04 ccw(c-388.34,955.04) v2@-403.33,940.05 ; v2(-409.54,933.84) -409.54,1013.84 -371.54,1051.84 -300.54,1051.84 -284.54,1067.84 -284.54,1319.84 -249.54,1354.84 ISP.1@-169.54,1354.84 ; ISP.1@-192.16,1332.22 ccw(c-246.79,1277.59) -246.79,1354.84 ccw(c-246.79,1432.1) ISP.1@-192.16,1377.47 ; ISP.1@-185.09,1339.29 ccw(c-222.65,1301.73) -222.65,1354.84 ccw(c-222.65,1407.96) ISP.1@-185.09,1370.4 ; -1345.55,1194.85 cw(c-1330.56,1209.84) -1351.76,1209.84 ccw(c-1330.56,1209.84) -1345.55,1194.85 ; -1345.55,1194.85 ccw(c-1360.54,1179.87) -1360.54,1201.06 cw(c-1360.54,1179.87) -1345.55,1194.85 ; -901.73,1180.84 cw(c-901.73,1159.65) -886.74,1174.63 ccw(c-901.73,1159.65) -901.73,1180.84 ; -901.73,1180.84 ccw(c-901.73,1202.04) -886.74,1187.05 cw(c-901.73,1202.04) -901.73,1180.84 ; -859.34,1180.84 cw(c-859.34,1202.04) -874.33,1187.05 ccw(c-859.34,1202.04) -859.34,1180.84 ; -859.34,1180.84 ccw(c-859.34,1159.65) -874.33,1174.63 cw(c-859.34,1159.65) -859.34,1180.84 ; -612.54,1877.65 cw(c-591.34,1877.65) -606.33,1892.63 ccw(c-591.34,1877.65) -612.54,1877.65 ; -612.54,1877.65 ccw(c-633.73,1877.65) -618.74,1892.63 cw(c-633.73,1877.65) -612.54,1877.65
MOSI: ISP.4 U2.3 U8.1 | length 3412.3
  TopLayer w10: U8.1@-1639.54,1292.84 -1509.84,1292.84 -1456.84,1239.84 -1337.54,1239.84 ; v2(-1327.54,1229.84) -1337.54,1239.84 ; U2.3@-688.54,1733.84 -688.54,1670.84 -715.54,1643.84 -715.54,1496.84 -780.54,1431.84 -826.54,1431.84 -851.54,1406.84 -851.54,971.84 -816.54,936.84 -453.54,936.84 -358.54,1031.84 -270.54,1031.84 -234.54,1067.84 -234.54,1169.84 -199.54,1204.84 -119.54,1204.84 ; ISP.4@-101.47,1252.78 cw(c-163.46,1248.77) -119.53,1204.84 ; ISP.4@-91.49,1253.42 cw(c-134.11,1250.67) -103.91,1220.47 cw(c-73.71,1190.27) ISP.4@-70.96,1232.89 ; ISP.4@-71.6,1222.91 ccw(c-75.61,1160.92) -119.53,1204.84 ; ISP.4@-69.54,1254.84 -119.54,1204.84 ; U8.1@-1614.71,1290.01 cw(c-1607.88,1283.19) -1607.88,1292.84 ; U8.1@-1614.71,1290.01 cw(c-1607.88,1283.19) -1607.88,1292.84 ; U8.1@-1614.71,1290.01 cw(c-1607.88,1283.19) -1607.88,1292.84 ; U8.1@-1614.71,1290.01 cw(c-1607.88,1283.19) -1607.88,1292.84 ; U8.1@-1614.71,1290.01 cw(c-1607.88,1283.19) -1607.88,1292.84 ; U8.1@-1614.71,1290.01 cw(c-1607.88,1283.19) -1607.88,1292.84 ; U8.1@-1614.71,1295.67 ccw(c-1607.88,1302.5) -1607.88,1292.84 ; U8.1@-1614.71,1295.67 ccw(c-1607.88,1302.5) -1607.88,1292.84 ; U8.1@-1614.71,1295.67 ccw(c-1607.88,1302.5) -1607.88,1292.84 ; U8.1@-1614.71,1295.67 ccw(c-1607.88,1302.5) -1607.88,1292.84 ; U8.1@-1614.71,1295.67 ccw(c-1607.88,1302.5) -1607.88,1292.84 ; U8.1@-1614.71,1295.67 ccw(c-1607.88,1302.5) -1607.88,1292.84 ; -1337.54,1239.84 cw(c-1342.48,1234.89) -1335.85,1232.65 ccw(c-1342.48,1234.89) -1337.54,1239.84 ; -1337.54,1239.84 ccw(c-1332.59,1244.79) -1330.35,1238.16 cw(c-1332.59,1244.79) -1337.54,1239.84 ; -851.54,1200.65 cw(c-830.34,1200.65) -845.33,1215.63 ccw(c-830.34,1200.65) -851.54,1200.65 ; -851.54,1200.65 ccw(c-872.73,1200.65) -857.74,1215.63 cw(c-872.73,1200.65) -851.54,1200.65 ; -851.54,1243.04 cw(c-872.73,1243.04) -857.74,1228.05 ccw(c-872.73,1243.04) -851.54,1243.04 ; -851.54,1243.04 ccw(c-830.34,1243.04) -845.33,1228.05 cw(c-830.34,1243.04) -851.54,1243.04 ; -1372.87,1239.84 cw(c-1372.87,1184.5) -1333.74,1223.63 ccw(c-1372.87,1184.5) -1372.87,1239.84 ; -1348.73,1239.84 cw(c-1348.73,1208.65) -1326.67,1230.71 ccw(c-1348.73,1208.65) -1348.73,1239.84
  BottomLayer w10: v2(-1327.54,1229.84) -1319.54,1221.84 v2(-851.54,1221.84) ; -872.73,1221.84 cw(c-872.73,1200.65) -857.74,1215.63 ccw(c-872.73,1200.65) -872.73,1221.84 ; -872.73,1221.84 ccw(c-872.73,1243.04) -857.74,1228.05 cw(c-872.73,1243.04) -872.73,1221.84 ; v2@-1328.4,1228.98 ccw(c-1311.17,1246.21) -1311.17,1221.84 cw(c-1311.17,1246.21) v2@-1328.4,1228.98 ; v2@-1321.33,1236.05 ccw(c-1287.03,1270.35) -1287.03,1221.84 cw(c-1287.03,1270.35) v2@-1321.33,1236.05
Net1k_1: 1K.1 LED2.1 | length 75
  TopLayer w10: 1K.1@-356.54,1129.84 LED2.1@-281.54,1129.84
Net16M_1: 16M.1 C50.1 U8.7 | length 3324.2
  TopLayer w10: C50.1@-2049.54,1263.84 16M.1@-1879.54,1263.84 -1719.54,1103.84 U8.7@-1639.54,1103.84 ; C50.1@-2042.46,1270.91 ccw(c-2025.39,1287.98) -2025.39,1263.84 ; C50.1@-2042.46,1270.91 ccw(c-2025.39,1287.98) -2025.39,1263.84 ; C50.1@-2042.46,1270.91 ccw(c-2025.39,1287.98) -2025.39,1263.84 ; C50.1@-2042.46,1270.91 ccw(c-2025.39,1287.98) -2025.39,1263.84 ; C50.1@-2042.46,1270.91 ccw(c-2025.39,1287.98) -2025.39,1263.84 ; C50.1@-2042.46,1270.91 ccw(c-2025.39,1287.98) -2025.39,1263.84 ; C50.1@-2042.46,1270.91 ccw(c-2025.39,1287.98) -2025.39,1263.84 ; C50.1@-2042.46,1270.91 ccw(c-2025.39,1287.98) -2025.39,1263.84 ; C50.1@-2042.46,1270.91 ccw(c-2025.39,1287.98) -2025.39,1263.84 ; C50.1@-2035.39,1277.98 ccw(c-2001.25,1312.13) -2001.25,1263.84 ; C50.1@-2035.39,1277.98 ccw(c-2001.25,1312.13) -2001.25,1263.84 ; C50.1@-2035.39,1277.98 ccw(c-2001.25,1312.13) -2001.25,1263.84 ; C50.1@-2035.39,1277.98 ccw(c-2001.25,1312.13) -2001.25,1263.84 ; C50.1@-2035.39,1277.98 ccw(c-2001.25,1312.13) -2001.25,1263.84 ; C50.1@-2035.39,1277.98 ccw(c-2001.25,1312.13) -2001.25,1263.84 ; C50.1@-2035.39,1277.98 ccw(c-2001.25,1312.13) -2001.25,1263.84 ; -1932.65,1263.84 cw(c-1932.65,1210.73) 16M.1@-1895.09,1248.29 ; -1932.65,1263.84 ccw(c-1932.65,1316.96) 16M.1@-1895.09,1279.4 ; -1932.65,1263.84 cw(c-1932.65,1210.73) 16M.1@-1895.09,1248.29 ; -1932.65,1263.84 ccw(c-1932.65,1316.96) 16M.1@-1895.09,1279.4 ; -1932.65,1263.84 cw(c-1932.65,1210.73) 16M.1@-1895.09,1248.29 ; -1932.65,1263.84 ccw(c-1932.65,1316.96) 16M.1@-1895.09,1279.4 ; -1932.65,1263.84 cw(c-1932.65,1210.73) 16M.1@-1895.09,1248.29 ; -1932.65,1263.84 ccw(c-1932.65,1316.96) 16M.1@-1895.09,1279.4 ; -1932.65,1263.84 cw(c-1932.65,1210.73) 16M.1@-1895.09,1248.29 ; -1932.65,1263.84 ccw(c-1932.65,1316.96) 16M.1@-1895.09,1279.4 ; -1932.65,1263.84 ccw(c-1932.65,1316.96) 16M.1@-1895.09,1279.4 ; -1932.65,1263.84 cw(c-1932.65,1210.73) 16M.1@-1895.09,1248.29 ; -1932.65,1263.84 ccw(c-1932.65,1316.96) 16M.1@-1895.09,1279.4 ; -1932.65,1263.84 cw(c-1932.65,1210.73) 16M.1@-1895.09,1248.29 ; -1932.65,1263.84 ccw(c-1932.65,1316.96) 16M.1@-1895.09,1279.4 ; -1932.65,1263.84 cw(c-1932.65,1210.73) 16M.1@-1895.09,1248.29 ; -1932.65,1263.84 ccw(c-1932.65,1316.96) 16M.1@-1895.09,1279.4 ; -1932.65,1263.84 cw(c-1932.65,1210.73) 16M.1@-1895.09,1248.29 ; -1908.51,1263.84 cw(c-1908.51,1234.87) 16M.1@-1888.02,1255.36 ; -1908.51,1263.84 ccw(c-1908.51,1292.81) 16M.1@-1888.02,1272.33 ; -1908.51,1263.84 cw(c-1908.51,1234.87) 16M.1@-1888.02,1255.36 ; -1908.51,1263.84 ccw(c-1908.51,1292.81) 16M.1@-1888.02,1272.33 ; -1908.51,1263.84 cw(c-1908.51,1234.87) 16M.1@-1888.02,1255.36 ; -1908.51,1263.84 ccw(c-1908.51,1292.81) 16M.1@-1888.02,1272.33 ; -1908.51,1263.84 cw(c-1908.51,1234.87) 16M.1@-1888.02,1255.36 ; -1908.51,1263.84 ccw(c-1908.51,1292.81) 16M.1@-1888.02,1272.33 ; -1908.51,1263.84 cw(c-1908.51,1234.87) 16M.1@-1888.02,1255.36 ; -1908.51,1263.84 ccw(c-1908.51,1292.81) 16M.1@-1888.02,1272.33 ; -1908.51,1263.84 ccw(c-1908.51,1292.81) 16M.1@-1888.02,1272.33 ; -1908.51,1263.84 cw(c-1908.51,1234.87) 16M.1@-1888.02,1255.36 ; -1908.51,1263.84 ccw(c-1908.51,1292.81) 16M.1@-1888.02,1272.33 ; -1908.51,1263.84 cw(c-1908.51,1234.87) 16M.1@-1888.02,1255.36 ; -1908.51,1263.84 ccw(c-1908.51,1292.81) 16M.1@-1888.02,1272.33 ; -1908.51,1263.84 cw(c-1908.51,1234.87) 16M.1@-1888.02,1255.36 ; -1908.51,1263.84 ccw(c-1908.51,1292.81) 16M.1@-1888.02,1272.33 ; -1908.51,1263.84 cw(c-1908.51,1234.87) 16M.1@-1888.02,1255.36 ; 16M.1@-1879.54,1241.84 cw(c-1879.54,1188.73) -1841.98,1226.29 ; 16M.1@-1879.54,1241.84 cw(c-1879.54,1188.73) -1841.98,1226.29 ; 16M.1@-1879.54,1241.84 cw(c-1879.54,1188.73) -1841.98,1226.29 ; 16M.1@-1879.54,1241.84 cw(c-1879.54,1188.73) -1841.98,1226.29 ; 16M.1@-1879.54,1241.84 cw(c-1879.54,1188.73) -1841.98,1226.29 ; 16M.1@-1879.54,1241.84 cw(c-1879.54,1188.73) -1841.98,1226.29 ; 16M.1@-1879.54,1241.84 cw(c-1879.54,1188.73) -1841.98,1226.29 ; 16M.1@-1879.54,1241.84 cw(c-1879.54,1188.73) -1841.98,1226.29 ; 16M.1@-1879.54,1241.84 cw(c-1879.54,1188.73) -1841.98,1226.29 ; 16M.1@-1879.54,1251.84 cw(c-1879.54,1222.87) -1859.05,1243.36 ; 16M.1@-1879.54,1251.84 cw(c-1879.54,1222.87) -1859.05,1243.36 ; 16M.1@-1879.54,1251.84 cw(c-1879.54,1222.87) -1859.05,1243.36 ; 16M.1@-1879.54,1251.84 cw(c-1879.54,1222.87) -1859.05,1243.36 ; 16M.1@-1879.54,1251.84 cw(c-1879.54,1222.87) -1859.05,1243.36 ; 16M.1@-1879.54,1251.84 cw(c-1879.54,1222.87) -1859.05,1243.36 ; 16M.1@-1879.54,1251.84 cw(c-1879.54,1222.87) -1859.05,1243.36 ; 16M.1@-1879.54,1251.84 cw(c-1879.54,1222.87) -1859.05,1243.36 ; 16M.1@-1879.54,1251.84 cw(c-1879.54,1222.87) -1859.05,1243.36 ; 16M.1@-1867.54,1263.84 ccw(c-1838.56,1263.84) -1859.05,1243.36 ; 16M.1@-1867.54,1263.84 ccw(c-1838.56,1263.84) -1859.05,1243.36 ; 16M.1@-1867.54,1263.84 ccw(c-1838.56,1263.84) -1859.05,1243.36 ; 16M.1@-1867.54,1263.84 ccw(c-1838.56,1263.84) -1859.05,1243.36 ; 16M.1@-1867.54,1263.84 ccw(c-1838.56,1263.84) -1859.05,1243.36 ; 16M.1@-1867.54,1263.84 ccw(c-1838.56,1263.84) -1859.05,1243.36 ; 16M.1@-1867.54,1263.84 ccw(c-1838.56,1263.84) -1859.05,1243.36 ; 16M.1@-1867.54,1263.84 ccw(c-1838.56,1263.84) -1859.05,1243.36 ; 16M.1@-1867.54,1263.84 ccw(c-1838.56,1263.84) -1859.05,1243.36 ; 16M.1@-1857.54,1263.84 ccw(c-1804.42,1263.84) -1841.98,1226.29 ; 16M.1@-1857.54,1263.84 ccw(c-1804.42,1263.84) -1841.98,1226.29 ; 16M.1@-1857.54,1263.84 ccw(c-1804.42,1263.84) -1841.98,1226.29 ; 16M.1@-1857.54,1263.84 ccw(c-1804.42,1263.84) -1841.98,1226.29 ; 16M.1@-1857.54,1263.84 ccw(c-1804.42,1263.84) -1841.98,1226.29 ; 16M.1@-1857.54,1263.84 ccw(c-1804.42,1263.84) -1841.98,1226.29 ; 16M.1@-1857.54,1263.84 ccw(c-1804.42,1263.84) -1841.98,1226.29 ; 16M.1@-1857.54,1263.84 ccw(c-1804.42,1263.84) -1841.98,1226.29 ; 16M.1@-1857.54,1263.84 ccw(c-1804.42,1263.84) -1841.98,1226.29 ; -1671.19,1103.84 cw(c-1671.19,1094.19) U8.7@-1664.36,1101.01 ; -1671.19,1103.84 ccw(c-1671.19,1113.5) U8.7@-1664.36,1106.67 ; -1671.19,1103.84 cw(c-1671.19,1094.19) U8.7@-1664.36,1101.01 ; -1671.19,1103.84 ccw(c-1671.19,1113.5) U8.7@-1664.36,1106.67 ; -1671.19,1103.84 cw(c-1671.19,1094.19) U8.7@-1664.36,1101.01 ; -1671.19,1103.84 ccw(c-1671.19,1113.5) U8.7@-1664.36,1106.67 ; -1671.19,1103.84 ccw(c-1671.19,1113.5) U8.7@-1664.36,1106.67 ; -1671.19,1103.84 cw(c-1671.19,1094.19) U8.7@-1664.36,1101.01 ; -1671.19,1103.84 ccw(c-1671.19,1113.5) U8.7@-1664.36,1106.67 ; -1671.19,1103.84 cw(c-1671.19,1094.19) U8.7@-1664.36,1101.01 ; -1671.19,1103.84 ccw(c-1671.19,1113.5) U8.7@-1664.36,1106.67 ; -1671.19,1103.84 cw(c-1671.19,1094.19) U8.7@-1664.36,1101.01
Net16M_2: 16M.2 C51.1 U8.8 | length 3085.1
  TopLayer w10: C51.1@-2049.54,1068.84 -2046.87,1071.51 16M.2@-1878.12,1071.51 ; 16M.2@-1876.79,1072.84 U8.8@-1639.54,1072.84 ; C51.1@-2039.8,1064.44 cw(c-2022.73,1047.37) -2022.73,1071.51 ; C51.1@-2039.8,1064.44 cw(c-2022.73,1047.37) -2022.73,1071.51 ; C51.1@-2039.8,1064.44 cw(c-2022.73,1047.37) -2022.73,1071.51 ; C51.1@-2039.8,1064.44 cw(c-2022.73,1047.37) -2022.73,1071.51 ; C51.1@-2039.8,1064.44 cw(c-2022.73,1047.37) -2022.73,1071.51 ; C51.1@-2039.8,1064.44 cw(c-2022.73,1047.37) -2022.73,1071.51 ; C51.1@-2039.8,1064.44 cw(c-2022.73,1047.37) -2022.73,1071.51 ; C51.1@-2039.8,1064.44 cw(c-2022.73,1047.37) -2022.73,1071.51 ; C51.1@-2039.8,1064.44 cw(c-2022.73,1047.37) -2022.73,1071.51 ; C51.1@-2032.73,1057.37 cw(c-1998.58,1023.23) -1998.58,1071.51 ; C51.1@-2032.73,1057.37 cw(c-1998.58,1023.23) -1998.58,1071.51 ; C51.1@-2032.73,1057.37 cw(c-1998.58,1023.23) -1998.58,1071.51 ; C51.1@-2032.73,1057.37 cw(c-1998.58,1023.23) -1998.58,1071.51 ; C51.1@-2032.73,1057.37 cw(c-1998.58,1023.23) -1998.58,1071.51 ; C51.1@-2032.73,1057.37 cw(c-1998.58,1023.23) -1998.58,1071.51 ; C51.1@-2032.73,1057.37 cw(c-1998.58,1023.23) -1998.58,1071.51 ; -1931.23,1071.51 cw(c-1931.23,1018.4) 16M.2@-1893.68,1055.95 ; -1931.23,1071.51 ccw(c-1931.23,1124.62) 16M.2@-1893.68,1087.07 ; -1931.23,1071.51 cw(c-1931.23,1018.4) 16M.2@-1893.68,1055.95 ; -1931.23,1071.51 ccw(c-1931.23,1124.62) 16M.2@-1893.68,1087.07 ; -1931.23,1071.51 cw(c-1931.23,1018.4) 16M.2@-1893.68,1055.95 ; -1931.23,1071.51 ccw(c-1931.23,1124.62) 16M.2@-1893.68,1087.07 ; -1931.23,1071.51 cw(c-1931.23,1018.4) 16M.2@-1893.68,1055.95 ; -1931.23,1071.51 ccw(c-1931.23,1124.62) 16M.2@-1893.68,1087.07 ; -1931.23,1071.51 cw(c-1931.23,1018.4) 16M.2@-1893.68,1055.95 ; -1931.23,1071.51 ccw(c-1931.23,1124.62) 16M.2@-1893.68,1087.07 ; -1931.23,1071.51 ccw(c-1931.23,1124.62) 16M.2@-1893.68,1087.07 ; -1931.23,1071.51 cw(c-1931.23,1018.4) 16M.2@-1893.68,1055.95 ; -1931.23,1071.51 ccw(c-1931.23,1124.62) 16M.2@-1893.68,1087.07 ; -1931.23,1071.51 cw(c-1931.23,1018.4) 16M.2@-1893.68,1055.95 ; -1931.23,1071.51 ccw(c-1931.23,1124.62) 16M.2@-1893.68,1087.07 ; -1931.23,1071.51 cw(c-1931.23,1018.4) 16M.2@-1893.68,1055.95 ; -1931.23,1071.51 ccw(c-1931.23,1124.62) 16M.2@-1893.68,1087.07 ; -1931.23,1071.51 cw(c-1931.23,1018.4) 16M.2@-1893.68,1055.95 ; -1907.09,1071.51 cw(c-1907.09,1042.54) 16M.2@-1886.61,1063.02 ; -1907.09,1071.51 ccw(c-1907.09,1100.48) 16M.2@-1886.61,1079.99 ; -1907.09,1071.51 cw(c-1907.09,1042.54) 16M.2@-1886.61,1063.02 ; -1907.09,1071.51 ccw(c-1907.09,1100.48) 16M.2@-1886.61,1079.99 ; -1907.09,1071.51 cw(c-1907.09,1042.54) 16M.2@-1886.61,1063.02 ; -1907.09,1071.51 ccw(c-1907.09,1100.48) 16M.2@-1886.61,1079.99 ; -1907.09,1071.51 cw(c-1907.09,1042.54) 16M.2@-1886.61,1063.02 ; -1907.09,1071.51 ccw(c-1907.09,1100.48) 16M.2@-1886.61,1079.99 ; -1907.09,1071.51 cw(c-1907.09,1042.54) 16M.2@-1886.61,1063.02 ; -1907.09,1071.51 ccw(c-1907.09,1100.48) 16M.2@-1886.61,1079.99 ; -1907.09,1071.51 ccw(c-1907.09,1100.48) 16M.2@-1886.61,1079.99 ; -1907.09,1071.51 cw(c-1907.09,1042.54) 16M.2@-1886.61,1063.02 ; -1907.09,1071.51 ccw(c-1907.09,1100.48) 16M.2@-1886.61,1079.99 ; -1907.09,1071.51 cw(c-1907.09,1042.54) 16M.2@-1886.61,1063.02 ; -1907.09,1071.51 ccw(c-1907.09,1100.48) 16M.2@-1886.61,1079.99 ; -1907.09,1071.51 cw(c-1907.09,1042.54) 16M.2@-1886.61,1063.02 ; -1907.09,1071.51 ccw(c-1907.09,1100.48) 16M.2@-1886.61,1079.99 ; -1907.09,1071.51 cw(c-1907.09,1042.54) 16M.2@-1886.61,1063.02 ; 16M.2@-1869.64,1063.02 cw(c-1845.94,1039.32) -1845.94,1072.84 ; 16M.2@-1869.64,1063.02 cw(c-1845.94,1039.32) -1845.94,1072.84 ; 16M.2@-1869.64,1063.02 cw(c-1845.94,1039.32) -1845.94,1072.84 ; 16M.2@-1869.64,1063.02 cw(c-1845.94,1039.32) -1845.94,1072.84 ; 16M.2@-1869.64,1063.02 cw(c-1845.94,1039.32) -1845.94,1072.84 ; 16M.2@-1869.64,1063.02 cw(c-1845.94,1039.32) -1845.94,1072.84 ; 16M.2@-1869.64,1063.02 cw(c-1845.94,1039.32) -1845.94,1072.84 ; 16M.2@-1869.64,1063.02 cw(c-1845.94,1039.32) -1845.94,1072.84 ; 16M.2@-1869.64,1063.02 cw(c-1845.94,1039.32) -1845.94,1072.84 ; 16M.2@-1862.56,1055.95 cw(c-1821.79,1015.18) -1821.79,1072.84 ; 16M.2@-1862.56,1055.95 cw(c-1821.79,1015.18) -1821.79,1072.84 ; 16M.2@-1862.56,1055.95 cw(c-1821.79,1015.18) -1821.79,1072.84 ; 16M.2@-1862.56,1055.95 cw(c-1821.79,1015.18) -1821.79,1072.84 ; 16M.2@-1862.56,1055.95 cw(c-1821.79,1015.18) -1821.79,1072.84 ; 16M.2@-1862.56,1055.95 cw(c-1821.79,1015.18) -1821.79,1072.84 ; 16M.2@-1862.56,1055.95 cw(c-1821.79,1015.18) -1821.79,1072.84 ; 16M.2@-1862.56,1055.95 cw(c-1821.79,1015.18) -1821.79,1072.84 ; 16M.2@-1862.56,1055.95 cw(c-1821.79,1015.18) -1821.79,1072.84 ; 16M.2@-1862.56,1087.07 ccw(c-1828.22,1121.41) -1828.22,1072.84 ; 16M.2@-1862.56,1087.07 ccw(c-1828.22,1121.41) -1828.22,1072.84 ; 16M.2@-1862.56,1087.07 ccw(c-1828.22,1121.41) -1828.22,1072.84 ; 16M.2@-1862.56,1087.07 ccw(c-1828.22,1121.41) -1828.22,1072.84 ; 16M.2@-1862.56,1087.07 ccw(c-1828.22,1121.41) -1828.22,1072.84 ; 16M.2@-1862.56,1087.07 ccw(c-1828.22,1121.41) -1828.22,1072.84 ; 16M.2@-1862.56,1087.07 ccw(c-1828.22,1121.41) -1828.22,1072.84 ; 16M.2@-1862.56,1087.07 ccw(c-1828.22,1121.41) -1828.22,1072.84 ; 16M.2@-1862.56,1087.07 ccw(c-1828.22,1121.41) -1828.22,1072.84 ; -1671.19,1072.84 cw(c-1671.19,1063.18) U8.8@-1664.36,1070.01 ; -1671.19,1072.84 ccw(c-1671.19,1082.5) U8.8@-1664.36,1075.67 ; -1671.19,1072.84 cw(c-1671.19,1063.18) U8.8@-1664.36,1070.01 ; -1671.19,1072.84 ccw(c-1671.19,1082.5) U8.8@-1664.36,1075.67 ; -1671.19,1072.84 cw(c-1671.19,1063.18) U8.8@-1664.36,1070.01 ; -1671.19,1072.84 ccw(c-1671.19,1082.5) U8.8@-1664.36,1075.67 ; -1671.19,1072.84 ccw(c-1671.19,1082.5) U8.8@-1664.36,1075.67 ; -1671.19,1072.84 cw(c-1671.19,1063.18) U8.8@-1664.36,1070.01 ; -1671.19,1072.84 ccw(c-1671.19,1082.5) U8.8@-1664.36,1075.67 ; -1671.19,1072.84 cw(c-1671.19,1063.18) U8.8@-1664.36,1070.01 ; -1671.19,1072.84 ccw(c-1671.19,1082.5) U8.8@-1664.36,1075.67 ; -1671.19,1072.84 cw(c-1671.19,1063.18) U8.8@-1664.36,1070.01
NetC10_1: C10.1 U3.4 | length 489.2
  TopLayer w10: C10.1@-3795.62,1927.88 -3746.54,1927.88 -3727.54,1908.88 U3.4@-3655.62,1908.88 ; C10.1@-3788.55,1920.81 cw(c-3771.48,1903.74) -3771.48,1927.88 ; C10.1@-3788.55,1920.81 cw(c-3771.48,1903.74) -3771.48,1927.88 ; C10.1@-3788.55,1920.81 cw(c-3771.48,1903.74) -3771.48,1927.88 ; C10.1@-3788.55,1920.81 cw(c-3771.48,1903.74) -3771.48,1927.88 ; C10.1@-3788.55,1920.81 cw(c-3771.48,1903.74) -3771.48,1927.88 ; C10.1@-3788.55,1920.81 cw(c-3771.48,1903.74) -3771.48,1927.88 ; C10.1@-3788.55,1920.81 cw(c-3771.48,1903.74) -3771.48,1927.88 ; C10.1@-3788.55,1920.81 cw(c-3771.48,1903.74) -3771.48,1927.88 ; C10.1@-3788.55,1920.81 cw(c-3771.48,1903.74) -3771.48,1927.88 ; C10.1@-3788.55,1934.95 ccw(c-3771.48,1952.02) -3771.48,1927.88 ; C10.1@-3788.55,1934.95 ccw(c-3771.48,1952.02) -3771.48,1927.88 ; C10.1@-3788.55,1934.95 ccw(c-3771.48,1952.02) -3771.48,1927.88 ; C10.1@-3788.55,1934.95 ccw(c-3771.48,1952.02) -3771.48,1927.88 ; C10.1@-3788.55,1934.95 ccw(c-3771.48,1952.02) -3771.48,1927.88 ; C10.1@-3788.55,1934.95 ccw(c-3771.48,1952.02) -3771.48,1927.88 ; C10.1@-3788.55,1934.95 ccw(c-3771.48,1952.02) -3771.48,1927.88 ; C10.1@-3788.55,1934.95 ccw(c-3771.48,1952.02) -3771.48,1927.88 ; C10.1@-3788.55,1934.95 ccw(c-3771.48,1952.02) -3771.48,1927.88
NetC10_2: C10.2 U3.5 | length 487.9
  TopLayer w10: C10.2@-3795.62,1872.88 -3747.54,1872.88 -3731.54,1888.88 U3.5@-3655.62,1888.88 ; C10.2@-3788.55,1865.81 cw(c-3771.48,1848.74) -3771.48,1872.88 ; C10.2@-3788.55,1865.81 cw(c-3771.48,1848.74) -3771.48,1872.88 ; C10.2@-3788.55,1865.81 cw(c-3771.48,1848.74) -3771.48,1872.88 ; C10.2@-3788.55,1865.81 cw(c-3771.48,1848.74) -3771.48,1872.88 ; C10.2@-3788.55,1865.81 cw(c-3771.48,1848.74) -3771.48,1872.88 ; C10.2@-3788.55,1865.81 cw(c-3771.48,1848.74) -3771.48,1872.88 ; C10.2@-3788.55,1865.81 cw(c-3771.48,1848.74) -3771.48,1872.88 ; C10.2@-3788.55,1865.81 cw(c-3771.48,1848.74) -3771.48,1872.88 ; C10.2@-3788.55,1865.81 cw(c-3771.48,1848.74) -3771.48,1872.88 ; C10.2@-3788.55,1879.95 ccw(c-3771.48,1897.02) -3771.48,1872.88 ; C10.2@-3788.55,1879.95 ccw(c-3771.48,1897.02) -3771.48,1872.88 ; C10.2@-3788.55,1879.95 ccw(c-3771.48,1897.02) -3771.48,1872.88 ; C10.2@-3788.55,1879.95 ccw(c-3771.48,1897.02) -3771.48,1872.88 ; C10.2@-3788.55,1879.95 ccw(c-3771.48,1897.02) -3771.48,1872.88 ; C10.2@-3788.55,1879.95 ccw(c-3771.48,1897.02) -3771.48,1872.88 ; C10.2@-3788.55,1879.95 ccw(c-3771.48,1897.02) -3771.48,1872.88 ; C10.2@-3788.55,1879.95 ccw(c-3771.48,1897.02) -3771.48,1872.88 ; C10.2@-3788.55,1879.95 ccw(c-3771.48,1897.02) -3771.48,1872.88